# Altium PCB BLE_module_0730.PCBDOC
Units mil, origin at the board's own origin, x right, y up, seen from the top; angles counter-clockwise.
Board outline 6000 x 4000 mil, 2 copper layers (Top Layer, Bottom Layer); 23 components, 24 nets, 70 pads, 33 vias.
Unrouted connection lines stored in the file: 2.
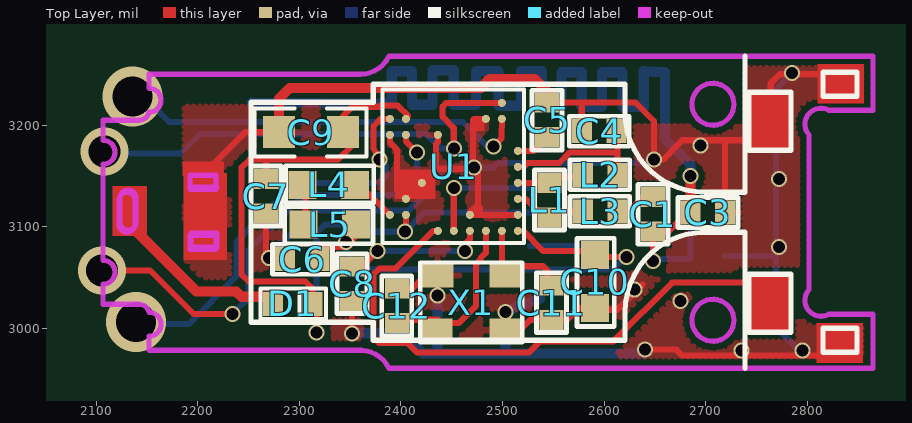
[diagram p0: Top Layer view]
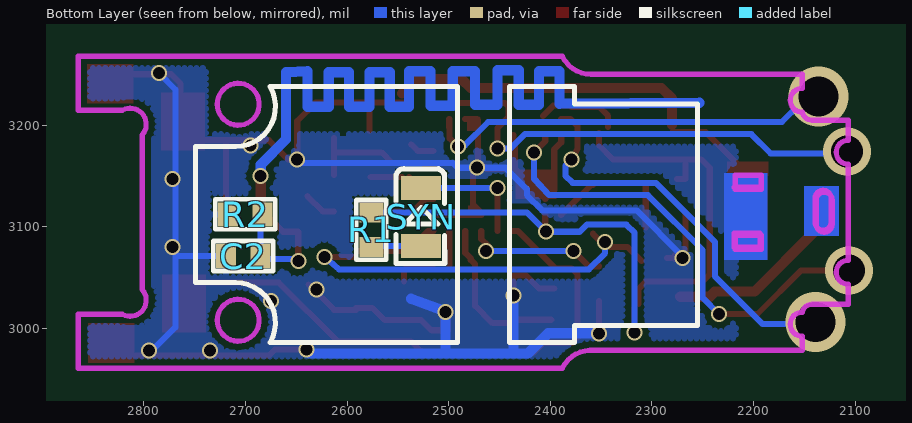
[diagram p1: Bottom Layer view, seen from below]

## Layer stack, top to bottom
Top Layer: signal copper 1.4
Dielectric: dielectric 12.6, FR-4, Dk 4.8
Bottom Layer: signal copper 1.4

## Board outline
1000,1000 1000,5000 7000,5000 7000,1000

## Design rules (kind name [scope] priority, off if disabled: settings)
Clearance [All] p1: gap=6
ComponentClearance [All] p1 off: gap=10 collisioncheckmode=0
PolygonConnect [All] p1: connectstyle=Relief reliefconductorwidth=6 reliefentries=4 polygonreliefangle="90 Angle"
RoutingLayers [All] p1: top layer=Horizontal bottom layer=Vertical
RoutingVias [All] p1: holewidth=28 width=50 viastyle="Through Hole" minholewidth=28 minwidth=50 maxholewidth=28 maxwidth=50
SolderMaskExpansion [All] p1: expansion=4
TestPointUsage [All] p1: valid=0 allowmultiple=FALSE
Testpoint [All] p1: side=15 testpointundercomponent=TRUE minsize=40 maxsize=100 preferedsize=60 minholesize=0 maxholesize=40 preferedholesize=32 testpointgrid=1 style=1023 order=1234567890
Width [All] p1: maxlimit=100 minlimit=6 preferedwidth=6
10 further rules are at their usual default settings.

## Components (designator, comment, footprint, x,y, rotation, side; value= is the part's Value field where it differs from the comment)
C1 "1.5pF" 0402 2636,3149 r270 top
C2 "1.2pF" 0402 2739,3059 r180 bottom
C3 "1pF" 0402 2739,3126 r180 top
C4 "2.2nF" 0402 2632,3206 r180 top
C5 "47nF" 0402 2556,3168 r90 top
C6 "1nF" 0402 2340,3080 r180 top
C7 "100nF" 0402 2255,3167 r270 top
C8 "100nF" 0402 2364,3007 r90 top
C9 "4.7uF" C0603 2309,3192 r180 top
C10 "1uF" C0603A 2561,3059 r180 top
C11 "12pF" 0402 2536,3062 r270 top
C12 "12pF" 0402 2408,2985 r90 top
D1 "RB520CS-30" SOD-923 2272,3012 r90 top
L1 "6nH" 0402 2534,3163 r270 top
L2 "6nH" 0402 2559,3139 r0 top
L3 "6nH" 0402 2559,3103 r0 top
L4 "15uH" C0603A 2316,3111 r270 top
L5 "10uH" C0603A 2343,3132 r90 top
R1 "270" 0402 2564,3060 r90 bottom
R2 "10K" 0402 2737,3100 r180 bottom
SYN "LED1" SYN1 2519,3181 r90 bottom
U1 "nrf51822 CEAA" NRF51822AA 2425,3180 r180 top
X1 "16M  25*20" CRY2520 2408,3018 r180 top

## Footprints (in the part's own frame and the unit in brackets; to place one, negate y for a bottom-side part, rotate by r counter-clockwise, add the part's x,y. Pads: shape width x height; smd on the part's side, far side on the other; paste and mask are expansions set on the pad)
0402 [mil]
  rect 19.68x23.62 smd: 1(54,12) 2(20,12)
  silkscreen extent 7,-3 66,27
C0603 [mm]
  rect 0.8x0.8 smd: 1(0.74,-0.023) 2(-0.86,-0.023)
  silkscreen extent -1.45,-0.61 1.35,0.59
C0603A [mil]
  rect 27.56x27.56 smd: 1(-30,39) 2(-30,-13)
  silkscreen extent -49,-30 -12,57
CRY2520 [mil]
  rect 31.5x23.62 smd: 1(-95,-34) 2(-28,-34) 3(-27,20) 4(-95,20)
  silkscreen extent -111,-47 -11,32
NRF51822AA [mm]
  round 0.2 smd: A1(-2.288,2.138) A2(-1.888,2.138) A3(-1.488,2.138) A4(-1.088,2.138) A5(-0.688,2.138) A6(-0.288,2.138) B1(-2.288,1.738) B4(-1.088,1.738) B8(0.512,1.738) B9(0.912,1.738) C1(-2.288,1.338) C8(0.512,1.338) D1(-2.288,0.938) D7(0.112,0.938) E1(-2.288,0.538) F1(-2.288,0.138) G6(-0.288,-0.262) G8(0.512,-0.262) G9(0.912,-0.262) H2(-1.888,-0.662) H3(-1.488,-0.662) H8(0.512,-0.662) H9(0.912,-0.662) J2(-1.888,-1.062)
  silkscreen extent -2.44,-1.4 1.09,2.44
SOD-923 [mil]
  rect 23.62x19.68 smd: 1(12,-2) 3(12,-41)
  silkscreen extent -3,-54 27,10
SYN1 [mm]
  rect 0.6x1 smd: 1(-2.54,0.203) 2(-1.092,0.203)
  silkscreen extent -2.98,-0.38 -0.61,0.84

## Part data
C1 C2 C3 C4 C5 C6 C7 C8 C10: library part CAP, "Capacitor, X7R, ?0%"
C9: library part CAP, "Capacitor, X5R, ?0%"
C11 C12: library part CAP, "Capacitor, NP0, ?%"
D1: library part BAT54
L1 L2 L3 L4: library part IND, "Chip inductor, IDC,min = 50 mA, ?0%"
L5: library part IND, "High frequency chip inductor ?0%"
R1 R2: library part "Res Thermal", "Thermistor"
SYN: "Typical RED GaAs LED"
U1: library part nRF51x22_CEAA, "Multi-protocol Bluetooth Low Energy and 2.4GHz proprietary system-on-chip"
X1: library part XTAL_4-pin_grounded, "XTAL SMD 2520, 16MHz, 8pF, ?0ppm"

## Via types
v1: diameter 15.75, hole 11.81, Top Layer to Bottom Layer, 29 vias
v2: diameter 59.06, hole 39.37, Top Layer to Bottom Layer, 2 vias
v3: diameter 47.24, hole 31.5, Top Layer to Bottom Layer, 2 vias

## Nets (pads, with @x,y where several pads share a name; then routed paths per layer and width w, separated by ;. In a path a pad name is that pad's centre, name@x,y a point inside that pad or via, vN(x,y) a via of type N, cw(c..) or ccw(c..) an arc to the next point about the centre after c; other vN are vias at no path point)
AVDD: C6.2 C10.2 L5.2 U1.A1 | length 466.4
  Top Layer w6: 2310,3066 2324,3080 2345,3080 L5.2@2358,3093 ; U1.A1 2520.19,3095.81 2540,3076 C10.2@2587,3076 ; C10.2@2593,3070 v1(2622,3070)
  Bottom Layer w6: v1(2346,3085) 2346,3074 2362,3058 2608,3058 v1(2622,3070)
GND: C2.2 C3.2 C4.1 C5.1 C6.1 C7.1 C8.2 C9.1 C10.1 C11.1 C12.1 R2.2 U1.B1 U1.B4 U1.C8 U1.D7 U1.G6 U1.G9 U1.H3 X1.2 X1.4 | length 2903.7
  Top Layer w6: 2207,3145 2207,3153 2246.91,3192.91 C9.1 ; v1@2267,3074 C7.1 ; v1(2270,3069) C6.1@2285,3069 ; C6.1@2277,3068 C6.1@2277,3072 ; v1(2352,2995) C8.2 ; U1.G9 2389.11,3182.89 2396,3176 2396,3136.17 U1.C8 2434.55,3157 ; C12.1 2411,3039 2424,3052 X1.2 v1(2436,3032) ; U1.G6 2436.35,3183.32 2434.55,3181.52 2434.55,3157 ; v1@2466.76,3160.76 2476,3151.52 2476,3122 2467.85,3113.85 U1.B4 U1.B1 ; U1.H3 2472.05,3206.05 2471,3205 2471,3165 2463,3157 2434.55,3157 ; X1.4 2517,2998 2527,3008 2563,3008 2575,3020 C10.1 ; C5.1 2631,3222 2649,3204 v1(2649,3166) 2658,3166 2677,3185 2749,3185 ; C4.1 2578,3222 ; C10.1@2591,3018 2612.78,3018 2637.78,3043 ; v1(2640,2979) 2671,2979 2677,2973 2823,2973 ; C3.2 2719,3183 ; 2764,3217 2764,3241 2773,3250 2825,3250
  Top Layer w10: C9.1@2280,3200 2280,3226 2290.5,3236.5 2478.5,3236.5 2487,3245 2532,3245 C5.1@2546,3231 ; X1.4 v1(2503,3016)
  Bottom Layer w6: v1(2270,3069) v1@2270,3073 ; v1@2270,3071 2315,3116 2408.03,3116 2423,3130.97 2423,3136.92 2444.08,3158 2491,3158 2495.83,3162.83 2645.83,3162.83 v1(2649,3166) ; C2.2 2769,3071 ; v1(2785,3251) 2769,3235 2769,3001 2792,2978 v1(2795,2978)
  Bottom Layer w10: v1(2352,2995) 2402,2995 2422,2975 2637,2975 v1@2641,2982 ; 2436,2975 v1(2436,3032) ; 2503,2976 v1(2503,3016) ; v1@2504,3017 2537,3029
  other v1: 2735,2978 2675,3027 2630,3038 2772,3080 2772,3147 2472,3158 2695,3180
N.C.: 
NetC1_1: C1.1 C2.1 C3.1 R2.1 | length 1140.6
  Top Layer w6: v1(2648,3066) C1.1 2663,3095 C3.1@2678,3110
  Top Layer w10: C3.1 v1(2685,3150)
  Bottom Layer w6: v1@2648,3068 C2.1@2684,3068 ; C2.1@2685,3070 R2.1@2685,3114
  Bottom Layer w10: 2253,3222 2391,3221 2391,3253 2411,3253 2411,3220 2431,3220 2431,3254 2452,3254 2452,3220 2474,3220 2474,3253 2496,3253 2496,3219 2518,3219 2518,3253 2539,3253 2539,3218 2558,3218 2558,3252 2578,3252 2578,3218 2598,3218 2598,3252 2618,3252 2618,3218 2639,3218 2639,3253 2660,3252 2660,3186 2685,3161 v1(2685,3150)
NetC1_2: C1.2 L3.1 | length 32.2
  Top Layer w6: L3.1 2624,3115 C1.2@2639,3130
NetC4_2: C4.2 L2.1 U1.E1 | length 139.8
  Top Layer w6: U1.E1 2520.8,3158.8 2524.55,3162.55 2555.55,3162.55 2566,3173 2613,3173 ; L2.1 C4.2@2613,3187
NetC5_2: C5.2 U1.F1 | length 24.6
  Top Layer w6: U1.F1 2530.55,3174.55 C5.2@2537,3181
NetC8_1: C8.1 U1.A4 | length 129.2
  Top Layer w6: C8.1 2362,3061 v1@2373,3072 ; v1@2461,3081 2467.85,3087.85 U1.A4
  Bottom Layer w6: v1(2377,3076) v1(2463,3076)
NetC11_2: C11.2 U1.A2 X1.1 | length 74.1
  Top Layer w6: X1.1@2499.35,3062.35 U1.A2 ; X1.1@2516,3061 2540,3061 2544,3057 C11.2@2544,3046
NetC12_2: C12.2 U1.A3 X1.3 | length 156.5
  Top Layer w6: C12.2@2399,3008.33 X1.3@2436.67,3008.33 ; X1.3@2440,3005 2457,3005 2474,3022 2474,3063 2478.25,3067.25 2478.25,3068.78 2483.6,3074.13 U1.A3
NetL1_1: L1.1 L3.2 U1.C1 | length 60.8
  Top Layer w6: U1.C1 2522.69,3127.31 L1.1@2537,3113 ; L1.1@2546,3115 L3.2
NetL1_2: L1.2 L2.2 U1.D1 | length 57.4
  Top Layer w6: U1.D1 2533.06,3143.06 L1.2@2539,3149 ; L1.2@2546,3149 L2.2@2577,3149
NetL4_1: L4.1 U1.B9 | length 43.3
  Top Layer w6: L4.1@2358,3141 2359.67,3141 U1.B9
NetL4_2: L4.2 L5.1 | length 42
  Top Layer w6: L5.1@2306,3099 L4.2@2306,3141
NetR1_2: R1.2 SYN.1 | length 48
  Bottom Layer w6: SYN.1 R1.2@2575,3081
P0.05: U1.H9 | length 387.4
  Top Layer w6: v1(2379,3166) 2373,3177 2373,3199 2380.05,3206.05 U1.H9
  Bottom Layer w6: v2@2150,3004 2191,3004 2238,3051 2238,3085 2296,3143 2378,3143 2385,3150 2385,3160 v1(2379,3166)
  other v2: 2139,3006
P0.06: U1.G8 | length 443.7
  Top Layer w6: v3@2121,3057 2153,3057 2196,3014 v1(2234,3014) ; U1.G8 2404.86,3184.14 v1(2416,3173)
  Bottom Layer w6: v1(2234,3014) 2250,3030 2250,3077.03 2304,3131 2401,3131 2416,3147 v1(2416,3173)
  other v3: 2106,3057
P0.21: SYN.2 U1.A5 | length 117.1
  Top Layer w6: U1.A5@2452,3095.91 v1(2452,3138)
  Bottom Layer w6: v1(2452,3138) SYN.2
P0.23: 
P0.24: U1.A6 | length 565.9
  Top Layer w6: U1.A6 2431.81,3095.81 2395,3059 2379,3059 2373,3053 2373,2991 2378.31,2985.69 2406.31,2985.69 2416,2976 2526,2976 2537,2987 2609,2987 2667,3045 2761,3045
SWDCLK: U1.H2 | length 383
  Top Layer w6: v1(2491,3179) 2499,3187 U1.H2
  Bottom Layer w6: v2@2155,3220 2172,3203 2461,3203 2484,3180 v1(2491,3179)
  other v2: 2136,3228
SWDIO: U1.J2 | length 441.2
  Top Layer w6: v1(2452,3177) 2452,3197 2441,3208 2441,3218 2444.8,3221.8 U1.J2
  Bottom Layer w6: v3@2129.96,3172 2183,3172 2202,3191 2425,3191 2439,3177 v1(2452,3177)
  other v3: 2108,3174
VCC_IN: D1.1 | length 158.5
  Top Layer w10: 2140,3095 2199,3036 2238,3036 2243,3031 D1.1@2272,3031
VCC_NRF: C7.2 C9.2 D1.3 R1.1 U1.B8 U1.H8 | length 840.9
  Top Layer w6: 2267,3165 C7.2 C7.2@2275,3147 ; D1.3 2313,3039 2306,3046 2250,3046 2243,3053 2243,3158 2251,3166 2338,3166 2351.85,3179.85 C9.2@2351.85,3191.91 ; v1(2317,2996) D1.3@2317,3020 ; C9.2@2343,3198 2343,3209 2352,3218 2378.99,3218 2380.13,3219.14 2397,3219 U1.H8@2407,3209 ; v1@2404.86,3100.86 U1.B8
  Bottom Layer w6: v1(2317,2996) 2317,3094 2325,3102 2364,3102 2371,3095 v1(2404,3095) 2423,3114 R1.1

## Polygon pours and split planes (outlines as drawn)
GND on Top Layer (hatched 90Degree grid 6 track 6, remove dead copper): 2187,2978 2187,3218 2348.62,3218 2348.62,3199 2739.02,3199 2739.02,3268 2866,3268 2866,2957 2187,2957
GND on Bottom Layer (hatched 90Degree grid 6 track 6, remove dead copper): 2217,3242 2217,2960 2867,2960 2867,3261 2739,3261 2739,3191 2346,3191 2346,3246

## Keep-outs
Keep-Out Layer:
  circle w5: c2707.08,3220.48 r20.67
  circle w5: c2707.08,3007.88 r20.67
  lines w5: 2193.5,3138.79 2219.09,3138.79 ; 2359.86,2978.35 2151.96,2978.35 2151.96,2992.13 ccw(c2151.96,3003.94) 2151.96,3015.75 ccw(c2142.32,3013.78) 2142.32,3023.63 2106.69,3023.63 2106.69,3043.31 ccw(c2106.69,3055.12) 2106.69,3066.93 2106.69,3161.42 ccw(c2106.69,3173.23) 2106.69,3185.04 2106.69,3204.73 2142.32,3204.73 ccw(c2142.32,3214.57) 2151.96,3212.6 ccw(c2151.96,3224.41) 2151.96,3236.22 2151.96,3250 2359.86,3250 ccw(c2359.86,3281.5) 2373.58,3253.15 ccw(c2359.86,3281.5) 2388.18,3267.72 2864.56,3267.72 2864.56,3214.57 2821,3214.57 ccw(c2813.38,3200.79) 2801.57,3190.37 2801.57,3037.98 ccw(c2813.38,3027.56) 2821,3013.78 2864.56,3013.78 2864.56,2960.63 2388.18,2960.63 ccw(c2359.86,2946.85) 2361.01,2978.33 ; 2122.43,3102.37 ccw(c2130.31,3102.37) 2138.18,3102.37 2138.18,3125.99 ccw(c2130.31,3125.99) 2122.43,3125.99 2122.43,3102.37 ; 2123.62,3104.34 ccw(c2131.5,3104.34) 2139.37,3104.34 2139.37,3127.96 ccw(c2131.5,3127.96) 2123.62,3127.96 2123.62,3104.34 ; 2192.32,3077.76 2192.32,3091.54 2217.91,3091.54 2217.91,3077.76 2192.32,3077.76 ; 2192.32,3136.81 2192.32,3150.59 2217.91,3150.59 2217.91,3136.81 2192.32,3136.81 ; 2193.5,3079.74 2193.5,3093.52 2219.09,3093.52 2219.09,3079.74 2193.5,3079.74

## Other copper
Top Layer:
  rectangle net GND: 2740,3174.91 2783.31,3232
  rectangle net P0.24: 2738.69,2996 2782,3053.09
  rectangle net GND: 2810,3221 2856,3260
  rectangle net GND: 2809,2966 2855,3005
  rectangle net GND: 2186,3067 2229,3153
  rectangle net VCC_IN: 2116,3091 2150,3140
  rectangle net GND: 2185,3150 2226,3164
  rectangle net GND: 2394,3127.31 2434,3156
  rectangle net GND: 2472.05,3194 2482,3206.05
  rectangle net GND: 2472,3111.56 2480.79,3121
Bottom Layer:
  rectangle net VCC_IN: 2116,3091 2150,3140
  rectangle net GND: 2186,3067 2229,3153

## Silkscreen, mask and mechanical layers (free items; w line width, h text height)
Top Overlay:
  lines w5: 2738.58,2960.63 2738.58,3094.49 2699.21,3094.49 ccw(c2699.21,3015.75) 2620.47,3015.75 2620.47,2988.19 2372.75,2988.19 2372.75,3005.91 2252.36,3005.91 2252.36,3222.44 2372.75,3222.44 2372.75,3240.16 2620.47,3240.16 2620.47,3212.6 ccw(c2699.21,3212.6) 2699.21,3133.86 2738.58,3133.86 2738.58,3267.72 ; 2742.51,2996.07 2783.85,2996.07 2783.85,3053.15 2742.51,3053.15 2742.51,2996.07 ; 2742.51,3175.2 2783.85,3175.2 2783.85,3232.29 2742.51,3232.29 2742.51,3175.2 ; 2815.35,2976.38 2848.81,2976.38 2848.81,3000 2815.35,3000 2815.35,2976.38 ; 2815.35,3228.35 2815.35,3251.97 2848.81,3251.97 2848.81,3228.35 2815.35,3228.35
Bottom Overlay:
  lines w5: 2255.09,3002.87 2255.09,3220.84 2376.32,3220.95 2376.32,3237.82 2440.13,3237.82 2440.13,2985.86 2376.32,2985.86 2376.32,3002.87 2255.09,3002.87 ; 2491.31,2985.86 2491.31,3237.82 2675.72,3237.82 ccw(c2709.82,3218.14) 2709.82,3178.77 2749.19,3178.77 2749.19,3044.91 2709.82,3044.91 ccw(c2709.82,3005.54) 2675.72,2985.86 2491.31,2985.86
Top Solder:
  rectangle: 2743,3175.91 2786.31,3233
  rectangle: 2741,2995.91 2784.31,3053
  rectangle: 2810,3221 2856,3260
  rectangle: 2809,2966 2855,3005
  rectangle: 2116,3091 2150,3140
  rectangle: 2186,3067 2229,3153
Bottom Solder:
  rectangle: 2116,3091 2150,3140
  rectangle: 2186,3067 2229,3153